# Altium PCB PCB1.PcbDoc
Units mm, origin at the board's own origin, x right, y up, seen from the top; angles counter-clockwise.
Board outline 150 x 110 mm, 2 copper layers (Top Layer, Bottom Layer); 40 components, 44 nets, 180 pads, 12 vias.
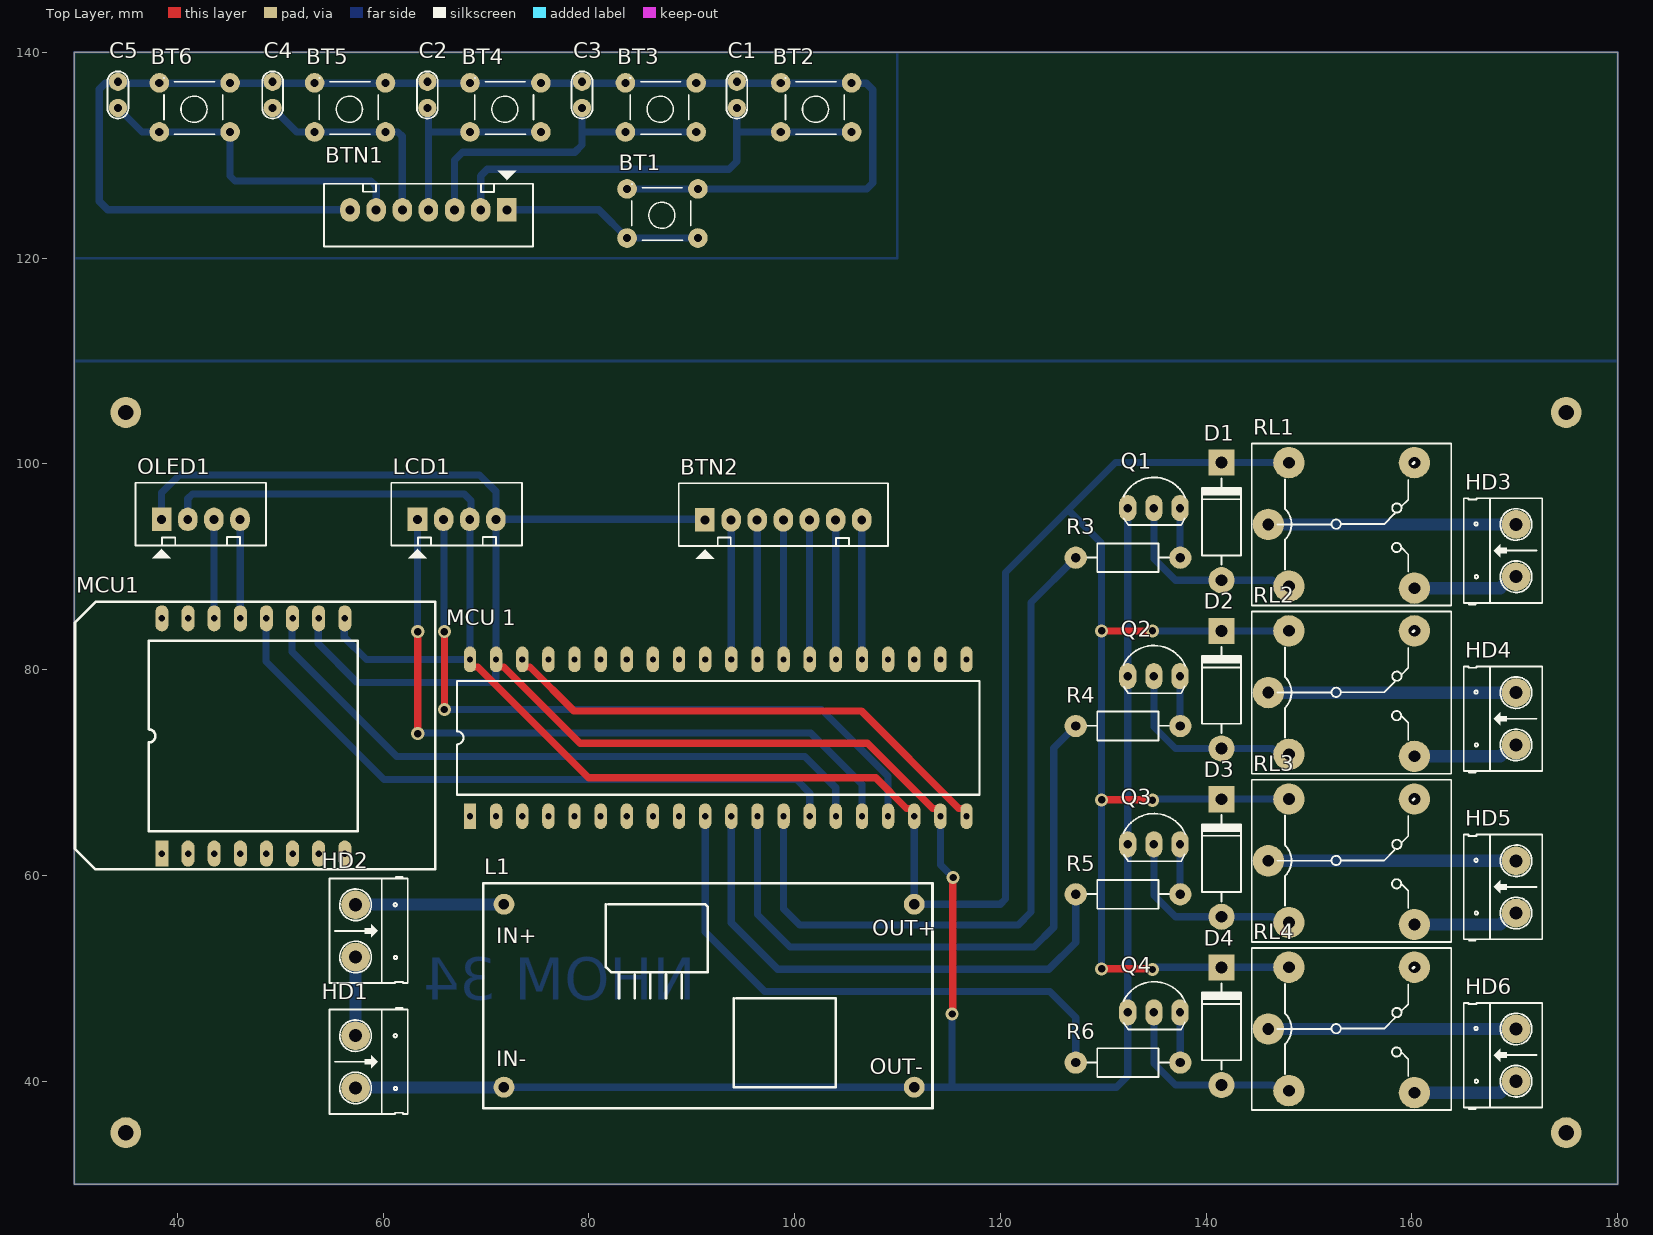
[diagram p0: Top Layer view]
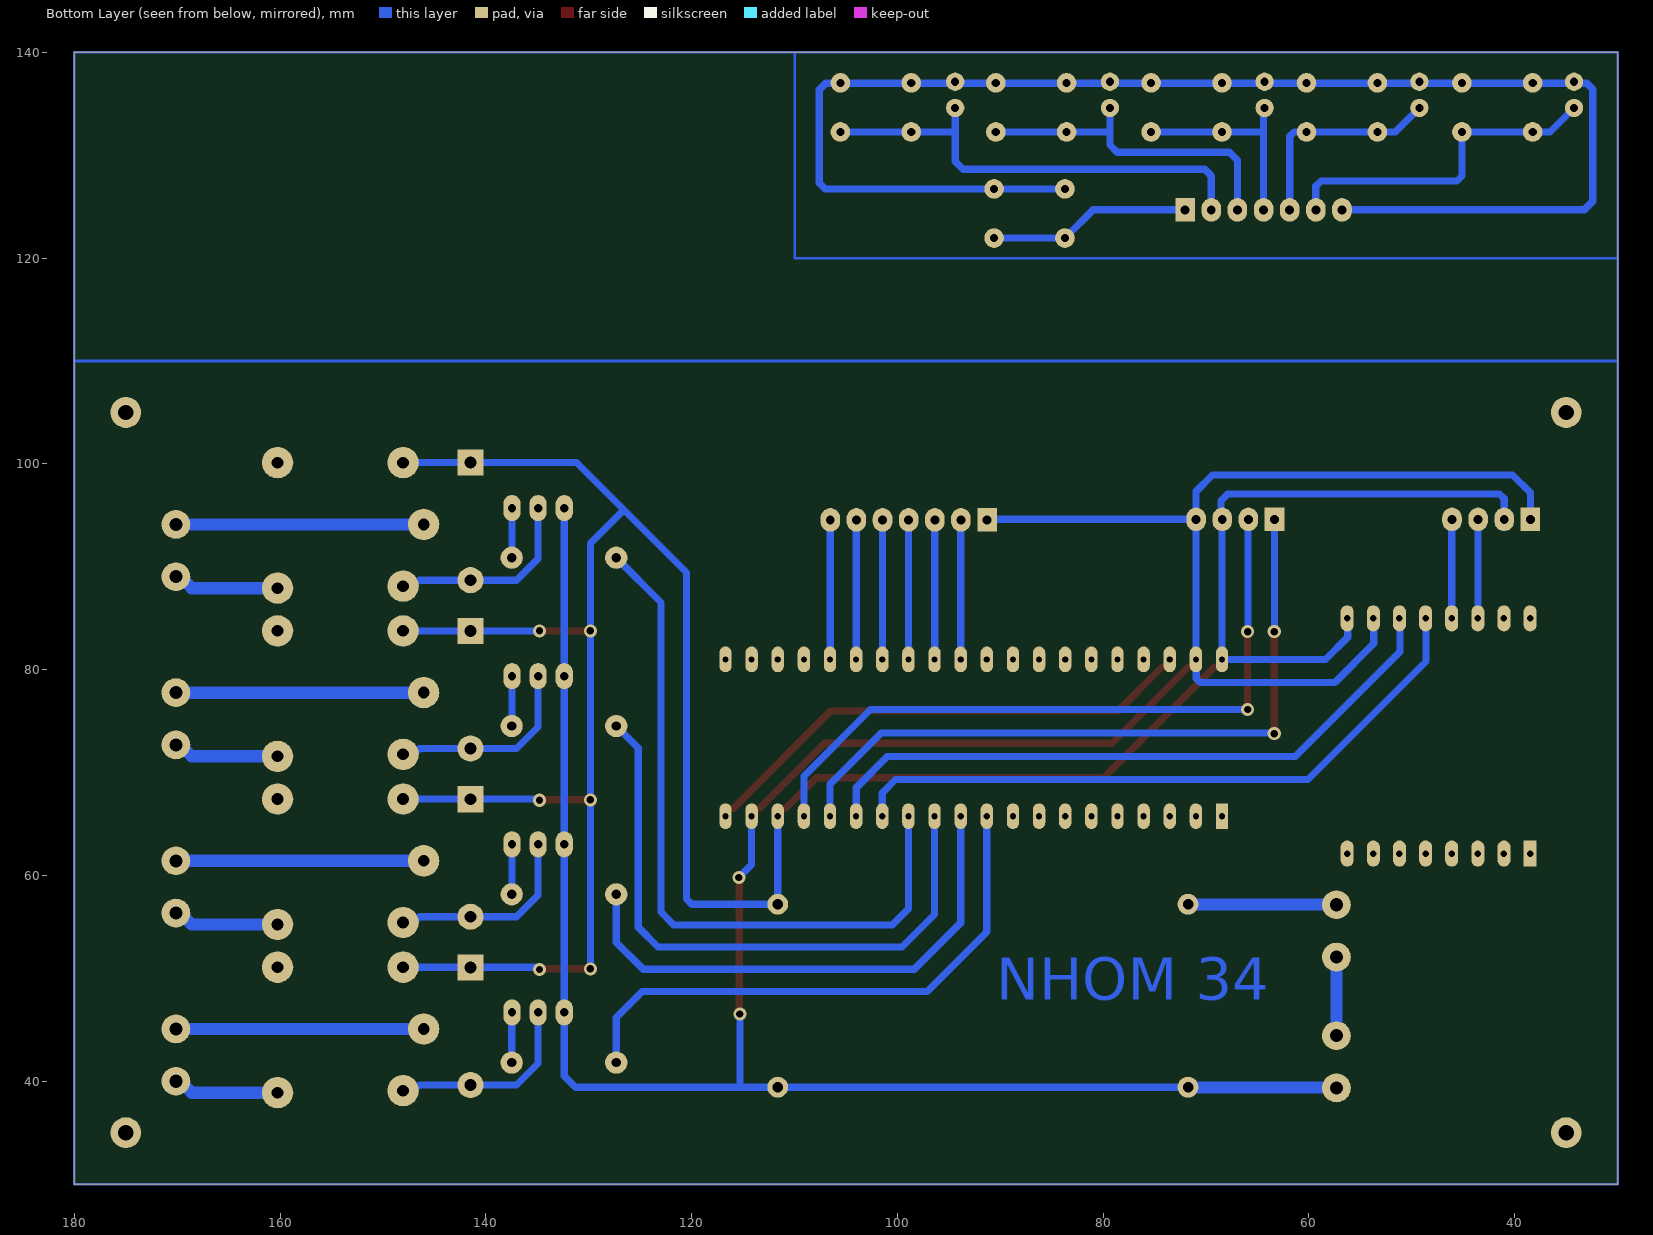
[diagram p1: Bottom Layer view, seen from below]
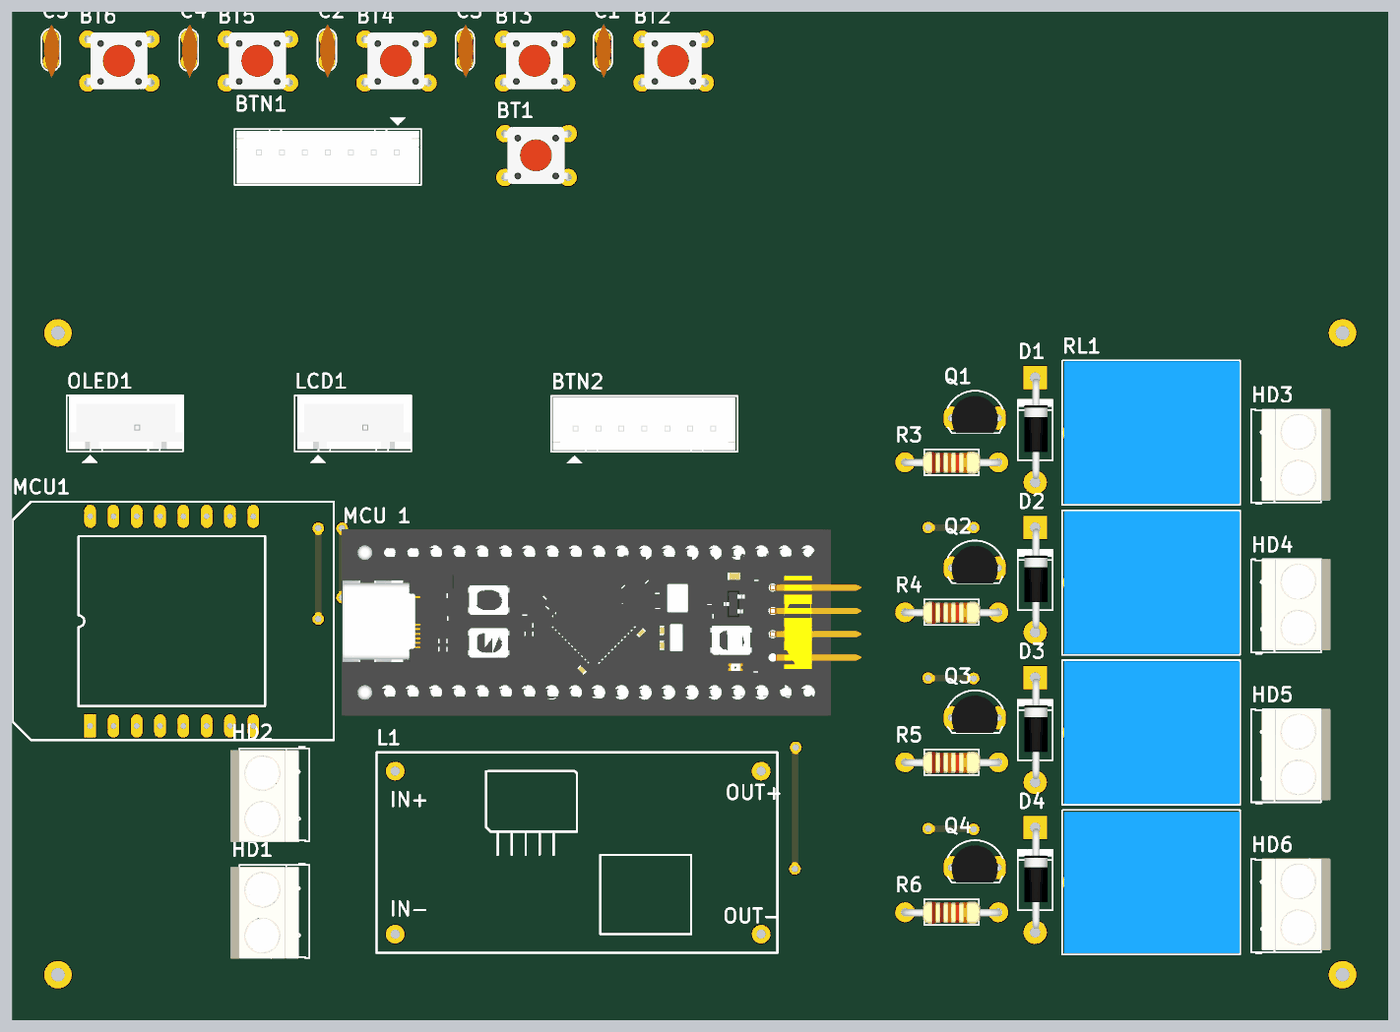
[diagram p2: 3D render of the assembled board from above, using the file's embedded part models]

## Layer stack, top to bottom
Top Solder: solder mask 0.0102, Solder Resist, Dk 3.5
Top Layer: signal copper 0.0356
Dielectric 1: dielectric 0.32, FR-4, Dk 4.8
Bottom Layer: signal copper 0.0356
Bottom Solder: solder mask 0.0102, Solder Resist, Dk 3.5

## Board outline
30,30 180,30 180,140 30,140

## Design rules (kind name [scope] priority, off if disabled: settings)
Clearance [All] p1: gap=0.3 ignorepadtopadclearanceinfootprint=FALSE
PolygonConnect [All] p1: connectstyle=Relief reliefconductorwidth=0.254 reliefentries=4 polygonreliefangle="90 Angle" airgapwidth=0.254
RoutingVias [All] p1: holewidth=0.711 width=1.27 viastyle="Through Hole" minholewidth=0.711 minwidth=1.27 maxholewidth=0.711 maxwidth=1.27
SolderMaskExpansion [All] p1: expansion=0.102 istentingtop=FALSE
SupplyNets "Schematic Supply Nets_27" [InNet('BTN1')] p1: voltage=0.000
SupplyNets "Schematic Supply Nets_26" [InNet('TX')] p2: voltage=0.000
SupplyNets "Schematic Supply Nets_25" [InNet('RST')] p3: voltage=0.000
SupplyNets "Schematic Supply Nets_24" [InNet('GND')] p4: voltage=0.000
SupplyNets "Schematic Supply Nets_23" [InNet('SDA ESP')] p5: voltage=0.000
SupplyNets "Schematic Supply Nets_22" [InNet('TB4')] p6: voltage=0.000
SupplyNets "Schematic Supply Nets_21" [InNet('+5')] p7: voltage=0.000
SupplyNets "Schematic Supply Nets_20" [InNet('SCL')] p8: voltage=0.000
SupplyNets "Schematic Supply Nets_19" [InNet('R')] p9: voltage=0.000
SupplyNets "Schematic Supply Nets_18" [InNet('BTN3')] p10: voltage=0.000
SupplyNets "Schematic Supply Nets_17" [InNet('5')] p11: voltage=0.000
SupplyNets "Schematic Supply Nets_16" [InNet('+12')] p12: voltage=0.000
SupplyNets "Schematic Supply Nets_15" [InNet('3')] p13: voltage=0.000
SupplyNets "Schematic Supply Nets_14" [InNet('DC IN')] p14: voltage=0.000
SupplyNets "Schematic Supply Nets_13" [InNet('TB2')] p15: voltage=0.000
SupplyNets "Schematic Supply Nets_12" [InNet('BTN4')] p16: voltage=0.000
SupplyNets "Schematic Supply Nets_11" [InNet('SDA')] p17: voltage=0.000
SupplyNets "Schematic Supply Nets_10" [InNet('4')] p18: voltage=0.000
SupplyNets "Schematic Supply Nets_9" [InNet('2')] p19: voltage=0.000
SupplyNets "Schematic Supply Nets_8" [InNet('1')] p20: voltage=0.000
SupplyNets "Schematic Supply Nets_7" [InNet('BTN2')] p21: voltage=0.000
SupplyNets "Schematic Supply Nets_6" [InNet('TB1')] p22: voltage=0.000
SupplyNets "Schematic Supply Nets_5" [InNet('RX')] p23: voltage=0.000
SupplyNets "Schematic Supply Nets_4" [InNet('+3.3')] p24: voltage=0.000
SupplyNets "Schematic Supply Nets_3" [InNet('TB3')] p25: voltage=0.000
SupplyNets "Schematic Supply Nets_2" [InNet('SCL ESP')] p26: voltage=0.000
SupplyNets "Schematic Supply Nets_1" [InNet('BTN5')] p27: voltage=0.000
SupplyNets "Schematic Supply Nets" [InNet('G')] p28: voltage=0.000
Width [All] p1: maxlimit=1.2 minlimit=0.5 preferedwidth=0.7
30 further rules are at their usual default settings.

## Components (designator, comment, footprint, x,y, rotation, side; value= is the part's Value field where it differs from the comment)
BT1 "BT" SW4 90.272,121.75 r180 top
BT2 "BT" SW4 105.212,132.062 r180 top
BT3 "BT" SW4 90.111,132.062 r180 top
BT4 "BT" SW4 75.009,132.062 r180 top
BT5 "BT" SW4 59.907,132.062 r180 top
BT6 "BT" SW4 44.806,132.062 r180 top
BTN1 "JP7" CON7 72.034,124.696 r180 top value="Connector 7"
BTN2 "JP7" CON7 91.288,94.564 r0 top value="Connector 7"
C1 "CAP gom" CN1 94.386,137.142 r270 top
C2 "CAP gom" CN1 64.31,137.142 r270 top
C3 "CAP gom" CN1 79.348,137.142 r270 top
C4 "CAP gom" CN1 49.272,137.142 r270 top
C5 "CAP gom" CN1 34.234,137.142 r270 top
D1 "1N4007" D2A 141.503,100.127 r270 top
D2 "1N4007" D2A 141.503,83.769 r270 top
D3 "1N4007" D2A 141.503,67.412 r270 top
D4 "1N4007" D2A 141.503,51.054 r270 top
HD1 "Header 2" HED2 57.33,44.425 r270 top
HD2 "Header 2" HED2 57.33,57.15 r270 top
HD3 "Header 2" HED2 170.129,89.036 r90 top
HD4 "Header 2" HED2 170.129,72.69 r90 top
HD5 "Header 2" HED2 170.129,56.344 r90 top
HD6 "Header 2" HED2 170.129,39.998 r90 top
L1 "BUCK_LM2596" BUCK_LM2596 91.313,49.073 r0 top
LCD1 "JP4" CON4 63.348,94.615 r0 top value="Connector 4"
MCU1 "ESP8266 D1 mini" "ESP D1 mini" 38.506,62.128 r90 top
"MCU 1" "KIT STM32F401" "KIT STM32F401" 68.453,65.761 r90 top
OLED1 "JP4" CON4 38.481,94.615 r0 top value="Connector 4"
Q1 "C1815" QTO-92 134.925,95.707 r0 top
Q2 "C1815" QTO-92 134.925,79.367 r0 top
Q3 "C1815" QTO-92 134.925,63.026 r0 top
Q4 "C1815" QTO-92 134.925,46.685 r0 top
R3 "1k" R1/2W 137.49,90.881 r180 top value="R1/4W - 1K"
R4 "1k" R1/2W 137.49,74.524 r180 top value="R1/4W - 1K"
R5 "1k" R1/2W 137.49,58.166 r180 top value="R1/4W - 1K"
R6 "1k" R1/2W 137.49,41.808 r180 top value="R1/4W - 1K"
RL1 "Relay" RL_SPDT_10A 146.049,94.118 r0 top value="Relay SPDT, 10A, 12V"
RL2 "Relay" RL_SPDT_10A 146.049,77.772 r0 top value="Relay SPDT, 10A, 12V"
RL3 "Relay" RL_SPDT_10A 146.049,61.426 r0 top value="Relay SPDT, 10A, 12V"
RL4 "Relay" RL_SPDT_10A 146.049,45.079 r0 top value="Relay SPDT, 10A, 12V"

## Footprints (in the part's own frame and the unit in brackets; to place one, negate y for a bottom-side part, rotate by r counter-clockwise, add the part's x,y. Pads: shape width x height; smd on the part's side, far side on the other; paste and mask are expansions set on the pad)
BUCK_LM2596 [mil]
  round 80 hole 40: 1(-770,320) 2(-770,-380) 3(800,-380) 4(800,320)
  silkscreen extent -850,-460 870,400
CN1 [mil]
  round 70 hole 31: 1(0,0) 2(100,0)
  silkscreen extent -40,-40 141,40, body extent -60,-30 170,37, height 265
CON4 [mil]
  rect 75x90 hole 34: 1(0,0)
  oval 75x90 hole 34: 2(100,0) 3(200,0) 4(300,0)
  silkscreen extent -100,-150 400,140, body extent -90,-90 398,136, height 276
CON7 [mil] "CON7"
  rect 75x90 hole 34: 1(0,0)
  oval 75x90 hole 34: 2(100,0) 3(200,0) 4(300,0) 5(400,0) 6(500,0) 7(600,0)
  silkscreen extent -100,-150 700,140, body extent -92,-93 692,134, height 276
D2A [mil] "Diode 2A, W 150mil, L 450mil"
  round 100 hole 45: 1(450,0)
  rect 100x100 hole 45: 2(0,0)
  silkscreen extent 61,-75 391,75, body extent 5,-47 435,54, height 100
"ESP D1 mini" [mm]
  rect 2.54x1.27 hole 0.635: 1(0,0)
  oval 2.54x1.27 hole 0.635: 2(0,-2.54) 3(0,-5.08) 4(0,-7.62) 5(0,-10.16) 6(0,-12.7) 7(0,-15.24) 8(0,-17.78) 9(22.86,-17.78) 10(22.86,-15.24) 11(22.86,-12.7) 12(22.86,-10.16) 13(22.86,-7.62) 14(22.86,-5.08) 15(22.86,-2.54) 16(22.86,0)
  silkscreen extent -1.54,-26.55 24.46,8.45
HED2 [mil] "Header 2, 2 pin, hight 300mil, Pin to Pin 200, Colour Green"
  round 110 hole 50: 1(0,0) 2(200,0)
  silkscreen extent -106,-100 300,200, body extent -92,-140 302,155, height 394
"KIT STM32F401" [mm]
  rect 2.5x1.2 hole 0.6: 1(0,0)
  oval 2.5x1.2 hole 0.6: 2(0,-2.54) 3(0,-5.08) 4(0,-7.62) 5(0,-10.16) 6(0,-12.7) 7(0,-15.24) 8(0,-17.78) 9(0,-20.32) 10(0,-22.86) 11(0,-25.4) 12(0,-27.94) 13(0,-30.48) 14(0,-33.02) 15(0,-35.56) 16(0,-38.1) 17(0,-40.64) 18(0,-43.18) 19(0,-45.72) 20(0,-48.26) 21(15.24,-48.26) 22(15.24,-45.72) 23(15.24,-43.18) 24(15.24,-40.64) 25(15.24,-38.1) 26(15.24,-35.56) 27(15.24,-33.02) 28(15.24,-30.48) 29(15.24,-27.94) 30(15.24,-25.4) 31(15.24,-22.86) 32(15.24,-20.32) 33(15.24,-17.78) 34(15.24,-15.24) 35(15.24,-12.7) 36(15.24,-10.16) 37(15.24,-7.62) 38(15.24,-5.08) 39(15.24,-2.54) 40(15.24,0)
  silkscreen extent 2.08,-49.53 13.16,1.27, body extent -2.51,-54.1 17.81,2.54, height 7.73
QTO-92 [mil] "TO-92"
  oval 66x100 hole 32: 1(-100,0) 2(0,0) 3(100,0)
  silkscreen extent -117,-65 120,118, body extent -109,-66 109,95, height 245
R1/2W [mil] "R 1/2W, 2 pin, 300mil"
  round 85 hole 35: 1(0,0) 2(400,0)
  silkscreen extent 42,-55 356,55, body extent -12,-45 414,49, height 91
RL_SPDT_10A [mil] "Relay SPDT, 5 pin, 10A,W 650mil, L 800mil, H 800mil"
  round 120 hole 45: 1(0,0) 2(559.06,236.22) 3(559.06,-243.78) 4(78.74,-236.22) 5(78.74,236.22)
  silkscreen extent -63,-311 700,310, body extent -55,-306 697,304, height 602
SW4 [mil] "SW button 4pin, 250 x250 mil"
  round 75 hole 31: 1(-13,-8) 1(258,-8) 2(-13,-196) 2(258,-196)
  silkscreen extent 15,-215 240,0, body extent -31,-225 281,19, height 276

## Part data
BT1 BT2 BT3 BT4 BT5 BT6: library part BUTTON
BTN1 BTN2: library part Con7, "Connector 7"
D1 D2 D3 D4: library part D1A, "Diode 1A"
HD1 HD2 HD3 HD4 HD5 HD6: library part Hed2, "Header 2 (Green)"
LCD1 OLED1: library part Con4, "Connector 4"
Q1 Q2 Q3 Q4: "NPN 600mW, ECB"
R3 R4 R5 R6: library part R1/4W, "Resistor 1/4W"
RL1 RL2 RL3 RL4: library part "Relay SRD", "Relay SPDT 5 Pin"

## Free pads (board coordinates)
  round 3 hole 1.5: 2(35,35) 2(35,105) 2(175,35) 2(175,105)

## Via types
v1: diameter 1.27, hole 0.711, Top Layer to Bottom Layer, 12 vias

## Nets (pads, with @x,y where several pads share a name; then routed paths per layer and width w, separated by ;. In a path a pad name is that pad's centre, name@x,y a point inside that pad or via, vN(x,y) a via of type N, cw(c..) or ccw(c..) an arc to the next point about the centre after c; other vN are vias at no path point)
1: BT2.1 BTN1.2 C1.2 | length 45.2
  Bottom Layer w0.7: BTN1.2 69.494,127.998 70.137,128.641 93.624,128.641 94.386,129.403 94.386,132.363 ; C1.2 94.386,132.363 ; BT2.1@105.543,132.265 98.659,132.265 94.484,132.265 94.386,132.363
2: BT3.1 BTN1.3 C3.2 | length 32.6
  Bottom Layer w0.7: BTN1.3 66.954,129.522 67.716,130.284 78.638,130.284 79.348,130.994 79.348,132.368 ; C3.2 79.348,132.368 ; BT3.1@90.441,132.265 79.451,132.265 79.348,132.368
3: BT4.1 BTN1.4 C2.2 | length 20.8
  Bottom Layer w0.7: BTN1.4 64.414,132.265 ; C2.2@64.414,134.602 64.414,132.265 ; BT4.1@75.339,132.265 64.414,132.265
4: BT5.1 BTN1.5 C4.2 | length 20.9
  Bottom Layer w0.7: C4.2 51.609,132.265 53.354,132.265 60.238,132.265 61.464,132.265 61.874,131.855 BTN1.5
5: BT6.1 BTN1.6 C5.2 | length 33.1
  Bottom Layer w0.7: C5.2 36.57,132.265 38.252,132.265 45.136,132.265 45.136,127.973 45.618,127.49 58.826,127.49 59.334,126.982 BTN1.6
+3.3: "MCU 1.20" "MCU 1.38" | length 50.1
  Top Layer w0.7: 73.533,81.001 73.533,80.486 73.764,80.255 74.279,80.255 78.537,75.997 106.477,75.997 115.967,66.506 116.482,66.506 116.713,66.275 116.713,65.761
+5: "MCU 1.18" "MCU 1.40" D1.2 D2.2 D3.2 D4.2 L1.4 LCD1.3 MCU1.9 OLED1.2 RL1.5 RL2.5 RL3.5 RL4.5 | length 292.7
  Top Layer w0.7: 68.453,81.001 68.453,80.486 68.684,80.255 69.199,80.255 79.959,69.494 107.899,69.494 110.887,66.506 111.402,66.506 111.633,66.275 111.633,65.761 ; v1(129.845,50.927) 134.722,50.927 v1(134.798,50.851) ; v1(129.845,67.348) 134.76,67.348 v1(134.798,67.31) ; v1(129.845,83.769) v1(134.798,83.769)
  Bottom Layer w0.7: OLED1.2 41.021,96.622 41.478,97.079 67.894,97.079 68.555,96.418 68.555,94.742 LCD1.3 68.44,94.602 68.44,81.013 68.453,81.001 58.395,81.001 56.236,83.16 MCU1.9@56.236,84.988 ; 111.633,65.761 L1.4 119.99,57.201 120.498,57.709 120.498,89.433 126.53,95.466 ; v1(129.845,50.927) v1(129.845,67.348) v1(129.845,83.769) 129.845,92.278 126.657,95.466 126.53,95.466 ; v1(134.798,50.851) 134.952,50.851 135.181,51.079 RL4.5 ; v1(134.798,67.31) 134.952,67.31 135.068,67.426 RL3.5 ; v1(134.798,83.769) D2.2 148.046,83.769 RL2.5 ; RL1.5 148.04,100.127 D1.2 131.191,100.127 126.53,95.466
+12: HD2.1 L1.1 | length 14.5
  Bottom Layer w0.7: L1.1@71.73,57.226 L1.1
  Bottom Layer w1.2: HD2.1 57.355,57.175 71.73,57.175 L1.1
BTN1: "MCU 1.26" BTN2.6 | length 13.6
  Bottom Layer w0.7: BTN2.6 104,94.551 104,81.013 104.013,81.001
BTN2: "MCU 1.27" BTN2.5 | length 13.6
  Bottom Layer w0.7: BTN2.5@101.448,93.712 BTN2.5@101.46,93.699 ; BTN2.5 101.46,94.551 BTN2.5@101.46,93.699 ; 101.473,81.001 101.46,81.013 BTN2.5@101.46,93.699 ; BTN2.5@101.473,93.686 BTN2.5@101.46,93.699
BTN3: "MCU 1.28" BTN2.4 | length 13.6
  Bottom Layer w0.7: BTN2.4 98.92,94.551 98.92,81.013 98.933,81.001
BTN4: "MCU 1.29" BTN2.3 | length 13.6
  Bottom Layer w0.7: BTN2.3@96.368,93.712 BTN2.3@96.38,93.699 ; BTN2.3 96.38,94.551 BTN2.3@96.38,93.699 ; 96.393,81.001 96.38,81.013 BTN2.3@96.38,93.699 ; BTN2.3@96.393,93.686 BTN2.3@96.38,93.699
BTN5: "MCU 1.30" BTN2.2 | length 13.6
  Bottom Layer w0.7: BTN2.2 93.84,94.551 93.84,81.013 93.853,81.001
"DC IN": HD1.1 HD2.2 | length 7.6
  Bottom Layer w1.2: HD1.1 HD2.2
G: BT1.2 BT2.2 BT3.2 BT4.2 BT5.2 BT6.2 BTN1.7 C1.1 C2.1 C3.1 C4.1 C5.1 | length 144.5
  Bottom Layer w0.7: BTN1.7 33.25,124.696 32.41,125.536 32.41,136.408 32.996,136.993 106.964,136.993 107.594,136.363 107.594,127.314 107.009,126.728 90.602,126.728 BT1.2@83.718,126.728
GND: "MCU 1.19" "MCU 1.39" BTN2.1 HD1.2 L1.2 L1.3 LCD1.4 MCU1.10 OLED1.1 Q1.1 Q2.1 Q3.1 Q4.1 | length 304.2
  Top Layer w0.7: 70.993,81.001 70.993,80.486 71.224,80.255 71.739,80.255 79.146,72.847 107.086,72.847 113.427,66.506 113.942,66.506 114.173,66.275 114.173,65.761 ; v1(115.316,46.533) 115.367,46.584 115.367,59.741 v1(115.418,59.792)
  Bottom Layer w0.7: OLED1.1 38.481,97.206 40.208,98.933 69.367,98.933 70.968,97.333 LCD1.4 ; MCU1.10@53.696,84.988 53.696,82.55 57.506,78.74 70.545,78.74 70.955,79.15 70.955,80.962 70.993,81.001 70.98,81.013 70.98,94.602 LCD1.4 ; L1.2 L1.3 115.316,39.421 ; BTN2.1@91.249,94.526 BTN2.1@91.288,94.488 ; BTN2.1 91.237,94.615 LCD1.4 ; 114.173,65.761 114.173,61.036 v1(115.418,59.792) ; v1(115.316,46.533) 115.316,39.421 ; Q1.1 Q2.1 Q3.1 Q4.1 132.385,40.513 131.293,39.421 115.316,39.421
  Bottom Layer w1.2: HD1.2 57.368,39.383 71.717,39.383 L1.2
NetD1_1: D1.1 Q1.2 RL1.4 | length 19.1
  Bottom Layer w0.7: Q1.2 134.925,90.789 137.017,88.697 D1.1 146.465,88.697 146.594,88.567 147.599,88.567 RL1.4
NetD2_1: D2.1 Q2.2 RL2.4 | length 19.2
  Bottom Layer w0.7: Q2.2 134.925,74.431 137.017,72.339 D2.1 146.465,72.339 146.583,72.221 147.599,72.221 RL2.4
NetD3_1: D3.1 Q3.2 RL3.4 | length 19.2
  Bottom Layer w0.7: Q3.2 134.925,58.073 137.017,55.982 D3.1 146.465,55.982 146.571,55.875 147.599,55.875 RL3.4
NetD4_1: D4.1 Q4.2 RL4.4 | length 19.2
  Bottom Layer w0.7: Q4.2 134.925,41.716 137.017,39.624 D4.1 146.465,39.624 146.56,39.529 147.599,39.529 RL4.4
NetHD3_1: HD3.1 RL1.3 | length 10.3
  Bottom Layer w1.2: RL1.3 168.588,87.926 169.698,89.036 HD3.1
NetHD3_2: HD3.2 RL1.1 | length 24.1
  Bottom Layer w1.2: RL1.1@146.049,94.117 HD3.2
NetHD4_1: HD4.1 RL2.3 | length 10.3
  Bottom Layer w1.2: RL2.3 168.588,71.58 169.698,72.69 HD4.1
NetHD4_2: HD4.2 RL2.1 | length 24.1
  Bottom Layer w1.2: RL2.1@146.049,77.771 HD4.2
NetHD5_1: HD5.1 RL3.3 | length 10.3
  Bottom Layer w1.2: RL3.3 168.588,55.234 169.698,56.344 HD5.1
NetHD5_2: HD5.2 RL3.1 | length 24.1
  Bottom Layer w1.2: RL3.1@146.049,61.425 HD5.2
NetHD6_1: HD6.1 RL4.3 | length 10.3
  Bottom Layer w1.2: RL4.3 168.588,38.887 169.698,39.998 HD6.1
NetHD6_2: HD6.2 RL4.1 | length 24.1
  Bottom Layer w1.2: RL4.1@146.049,45.079 HD6.2
NetQ1_3: Q1.3 R3.1 | length 4.8
  Bottom Layer w0.7: Q1.3 137.465,90.907 R3.1
NetQ2_3: Q2.3 R4.1 | length 4.9
  Bottom Layer w0.7: Q2.3 137.465,74.549 R4.1
NetQ3_3: Q3.3 R5.1 | length 4.9
  Bottom Layer w0.7: Q3.3 137.465,58.191 R5.1
NetQ4_3: Q4.3 R6.1 | length 4.9
  Bottom Layer w0.7: Q4.3 137.49,46.66 R6.1
R: BT1.1 BTN1.1 | length 19.7
  Bottom Layer w0.7: BTN1.1 80.975,124.696 83.718,121.953 BT1.1@90.602,121.953
RST: "MCU 1.25" BTN2.7 | length 13.6
  Bottom Layer w0.7: BTN2.7@106.528,93.712 BTN2.7@106.54,93.699 ; BTN2.7 106.54,94.551 BTN2.7@106.54,93.699 ; 106.553,81.001 106.54,81.013 BTN2.7@106.54,93.699 ; BTN2.7@106.553,93.686 BTN2.7@106.54,93.699
RX: "MCU 1.15" MCU1.11 | length 64.3
  Bottom Layer w0.7: MCU1.11@51.156,84.988 51.156,81.737 61.341,71.552 100.99,71.552 104.013,68.529 104.013,65.761
SCL: "MCU 1.16" LCD1.1 | length 69.2
  Top Layer w0.7: v1(63.373,73.787) v1@63.373,83.769
  Bottom Layer w0.7: LCD1.1 63.36,94.602 63.36,83.782 v1@63.373,83.769 ; v1(63.373,73.787) 63.424,73.838 101.575,73.838 106.553,68.859 106.553,65.761
  other v1: 63.373,83.693
"SCL ESP": MCU1.14 OLED1.3 | length 9.6
  Bottom Layer w0.7: OLED1.3 43.574,94.602 43.574,85.001 MCU1.14
SDA: "MCU 1.17" LCD1.2 | length 68.2
  Top Layer w0.7: v1(65.964,76.124) v1(65.964,83.693)
  Bottom Layer w0.7: LCD1.2 65.926,94.577 65.926,83.731 v1(65.964,83.693) ; v1(65.964,76.124) 102.616,76.124 109.093,69.647 109.093,65.761
"SDA ESP": MCU1.13 OLED1.4 | length 9.6
  Bottom Layer w0.7: OLED1.4 46.114,94.602 46.114,85.001 MCU1.13
TB1: "MCU 1.13" R3.2 | length 70.5
  Bottom Layer w0.7: 98.933,65.761 98.933,56.769 100.508,55.194 121.742,55.194 122.987,56.439 122.987,86.538 R3.2
TB2: "MCU 1.12" R4.2 | length 60.9
  Bottom Layer w0.7: 96.393,65.761 96.393,56.21 99.568,53.035 123.266,53.035 125.197,54.966 125.197,72.39 R4.2
TB3: "MCU 1.11" R5.2 | length 51.5
  Bottom Layer w0.7: 93.853,65.761 93.853,55.397 98.374,50.876 124.714,50.876 127.33,53.492 R5.2
TB4: "MCU 1.10" R6.2 | length 55.1
  Bottom Layer w0.7: 91.313,65.761 91.313,54.508 97.104,48.717 124.816,48.717 127.33,46.203 R6.2
TX: "MCU 1.14" MCU1.12 | length 64.6
  Bottom Layer w0.7: MCU1.12@48.616,84.988 48.616,80.797 60.096,69.317 100.178,69.317 101.473,68.021 101.473,65.761
pads on no net: "MCU 1.1" "MCU 1.2" "MCU 1.3" "MCU 1.4" "MCU 1.5" "MCU 1.6" "MCU 1.7" "MCU 1.8" "MCU 1.9" "MCU 1.21" "MCU 1.22" "MCU 1.23" "MCU 1.24" "MCU 1.31" "MCU 1.32" "MCU 1.33" "MCU 1.34" "MCU 1.35" "MCU 1.36" "MCU 1.37" MCU1.1 MCU1.2 MCU1.3 MCU1.4 MCU1.5 MCU1.6 MCU1.7 MCU1.8 MCU1.15 MCU1.16 RL1.2 RL2.2 RL3.2 RL4.2
copper on no net: | length 1180
  Bottom Layer w0.254: 30,30 180,30 ; 30,30 30,140 ; 30,30 30,110 180,110 180,30 ; 30,30 180,30 ; 30,140 180,140 180,30 ; 30,140 110,140 110,120 30,120 30,140

## Other copper
Bottom Layer:
  text "NHOM 34" at 90.373,46.566 h7

## Text inside footprints (layer, text, board x,y; h text height)
L1: Top Overlay "IN+" at 70.993,53.391 h1.52; Top Overlay "IN-" at 70.993,41.453 h1.52; Top Overlay "OUT+" at 107.569,54.153 h1.52; Top Overlay "OUT-" at 107.315,40.691 h1.52